# Allegro board PROIECT1 PCB.brd
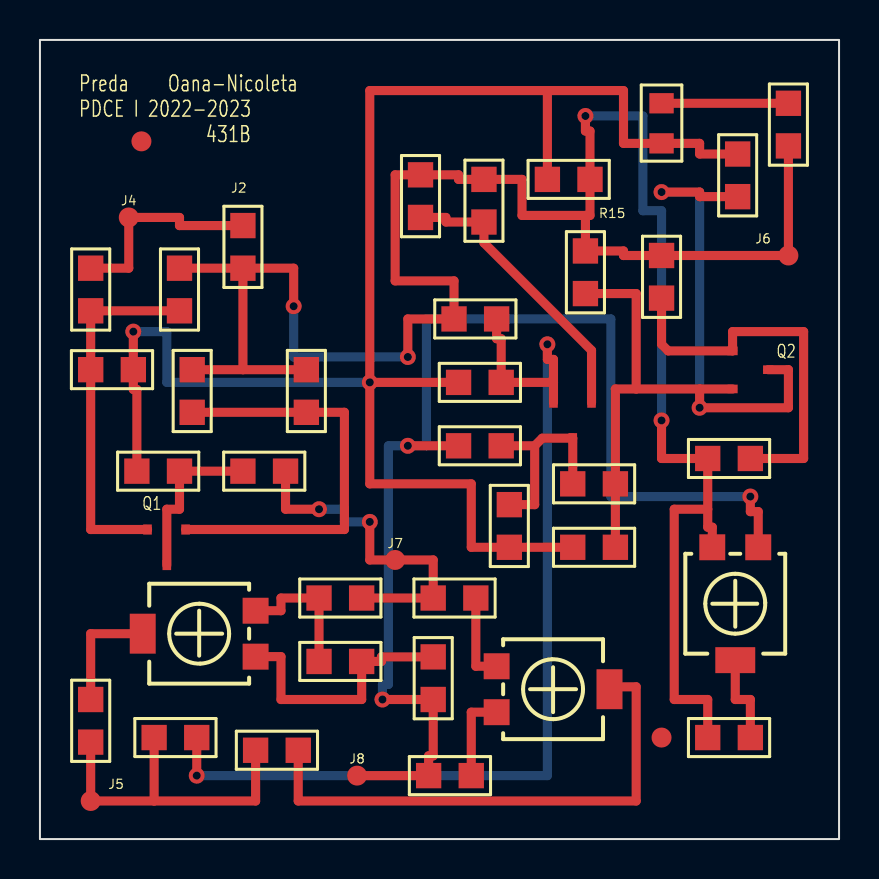
[diagram p0: board, top side]
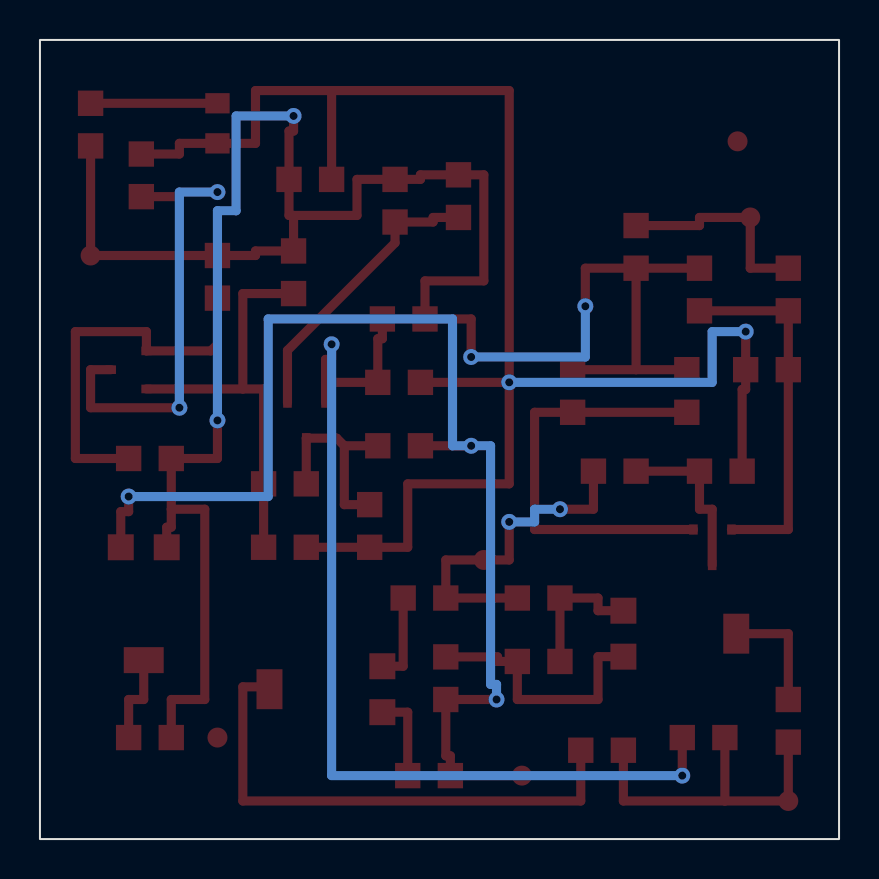
[diagram p1: board, bottom side, seen from below]

Outline 40 x 40 mm; copper layers: TOP, BOTTOM. Coordinates in mm from the lower left corner of the outline.
Outline path: rectangle 0,0 40,40

## Design rules (mm)
nets with their own width: min track width 0.457; nets GND N100149 N100153 N100161 N100173 N100183 N100207 N100221 N100229 N100265 N100275 N100287 N100353 N100359 N100485 N100523 N100783 N101301 N101533 N101539 N101607 N1070531

## Placement (name value [footprint] x y rotation side)
C1  10u  [SMC0805]  2.54 28.57 270 top
C2  2.2n  [SMC0805]  13.97 8.89 0 top
C3  470p  [SMC0805]  19.68 12.06 0 top
C4  470p  [SMC0805]  21.59 3.17 180 top
C5  10u  [SMC0805]  20.95 19.68 0 top
C6  10u  [SMC0805]  31.11 29.21 270 top
C7  10u  [SMC0805]  22.23 33.02 270 top
C8  10u  [SMC0805]  26.67 17.78 0 top
C9  10u  [SMC0805]  13.34 23.5 270 top
C10  10u  [SMC0805]  10.16 18.41 0 top
C11  10u  [SMC0805]  5.71 5.08 0 top
D1  LED  [SML0805]  31.11 36.83 270 top
J1  VIN  [SMR0805]  25.4 33.02 0 top
J2  VIN  [SMR0805]  10.16 28.57 90 top
J3  VOUT  [SMR0805]  35.56 5.08 180 top
J4  CON1  [TP100]  4.45 31.11 0 top
J5  CON1  [TP100]  2.54 1.91 0 top
J6  CON1  [TP100]  37.47 29.21 0 top
J7  CON1  [TP100]  17.78 13.97 0 top
J8  CON1  [TP100]  15.88 3.17 0 top
NOREF  -  [unnamed]  31.11 5.08 0 top
NOREF#2  -  [unnamed]  5.08 34.92 0 top
P1  100k  [TS53YL]  10.79 11.43 0 top
P2  100k  [TS53YL]  22.86 6.35 180 top
P3  100k  [TS53YL]  33.66 14.61 90 top
Q1  QBC817-25  [SOT23]  6.35 14.61 270 top
Q2  QBC817-25  [SOT23]  35.56 23.5 0 top
Q3  QBC817-25  [SOT23]  26.67 20.95 270 top
R1  10k  [SMR0805]  2.54 23.5 0 top
R2  6.8k  [SMR0805]  6.99 28.57 270 top
R3  3k  [SMR0805]  6.99 18.41 180 top
R4  3.8k  [SMR0805]  7.62 23.5 270 top
R5  1k  [SMR0805]  13.97 12.06 0 top
R6  100k  [SMR0805]  19.68 6.99 90 top
R7  4.7k  [SMR0805]  2.54 6.99 270 top
R8  15k  [SMR0805]  20.95 22.86 0 top
R9  1.5k  [SMR0805]  22.86 26.04 180 top
R10  5k  [SMR0805]  34.92 34.29 270 top
R11  10k  [SMR0805]  35.56 19.05 180 top
R12  510  [SMR0805]  10.79 4.45 0 top
R13  100  [SMR0805]  19.05 31.11 90 top
R14  0.8k  [SMR0805]  23.5 14.61 90 top
R15  30k  [SMR0805]  27.3 27.3 90 top
R16  30k  [SMR0805]  26.67 14.61 0 top
R18  1k  [SMR0805]  37.47 36.83 270 top

## Library data of the parts
C1-C11 = C
D1 = LED
J1-J3 = CON2
J4-J8 = CON1
P1-P3 = POT
Q1-Q3 = QBC817-25
R1-R16 R18 = R

## Footprints (pads in the part's own frame, mm; a bottom-side part is the same pattern mirrored in y, then rotated)
SMC0805
  rect 1.27x1.27 smd: 1(0,0) 2(2.134,0)
SML0805
  rect 1.016x1.219 smd: 1(0,0) 2(2.007,0)
SMR0805
  rect 1.27x1.27 smd: 1(0,0) 2(2.134,0)
SOT23
  rect 0.508x0.432 smd: 1(-0.889,0.94) 2(-0.889,-0.965) 3(0.889,0)
TP100
  round 1 smd: 1(0,0)
TS53YL
  rect 1.3x1.3 smd: 1(0,0) 3(0,-2.3)
  rect 1.3x2 smd: 2(-5.65,-1.15)
unnamed
  round 1 smd: (0,0)

## Nets
GND: C6.1 C7.1 C9.1 J1.2 J2.1 J3.2 J6.1 P3.1 R2.1 R4.1 R9.2 R11.2 R13.2 R15.2 R18.2
N100149: C11.2 Q3.2(B) R8.2 R9.1
N100153: P2.2(T) R12.2
N100161: D1.2(ANODE) J1.1 R1.2 R3.2 R8.1 R10.1 R14.1 R16.1
N100173: C3.1 C10.2 J7.1 R5.2
N100183: C4.2 C5.1 J8.1 P3.3(2) R6.1
N100207: C11.1 J5.1 R7.2 R12.1
N100221: C6.2 Q2.1(E) R11.1
N100229: C8.2 Q2.2(B) Q2.3(C) R10.2 R15.1 R16.2
N100265: C1.1 J2.2 J4.1
N100275: C1.2 Q1.2(B) R1.1 R2.2
N100287: C9.2 Q1.1(E) R4.2
N100353: C10.1 Q1.3(C) R3.1
N100359: C7.2 Q3.1(E) R13.1
N100485: C2.1 P1.1 R5.1
N100523: C5.2 C8.1 Q3.3(C) R14.2
N100783: C2.2 P1.3(2) R6.2
N101301: P1.2(T) R7.1
N101533: C3.2 P2.3(2)
N101539: C4.1 P2.1
N101607: J3.1 P3.2(T)
N1070531: D1.1(CATHODE) R18.1

## Via types
v1: diameter 0.8, hole 0.4, TOP to BOTTOM, 15 vias

## Routing (per net, layer and track width the routed paths; a pad name or vN(x,y) marks a point on that pad's centre or on a via; arc(x,y) is an arc through that point)
GND: length 118.4
  TOP w0.457: 27.3,31.22 R15.2 29.21,29.44 29.21,29.21 C6.1 J6.1 R18.2 ; 27.3,31.22 27.53,31.22 J1.2 27.53,35.44 27.3,35.44 v1(27.3,36.2) ; 27.3,31.22 24.13,31.22 24.13,33.02 C7.1 20.95,33.02 20.95,33.25 R13.2 17.78,33.25 17.78,27.94 20.73,27.94 R9.2 18.41,26.04 v1(18.41,24.13) ; J2.1 10.16,23.5 ; J2.1 R2.1 ; J2.1 12.7,28.57 v1(12.7,26.67) ; 10.16,23.5 R4.1 ; 10.16,23.5 C9.1 ; 33.43,16.51 R11.2 31.11,19.05 v1(31.11,20.95) ; 33.43,16.51 31.75,16.51 31.75,6.99 33.43,6.99 J3.2 ; 33.43,16.51 33.43,15.61 33.66,15.61 P3.1
  BOTTOM w0.457: v1(27.3,36.2) 30.18,36.2 30.18,31.45 31.11,31.45 v1(31.11,20.95) ; v1(12.7,26.67) 12.7,24.13 v1(18.41,24.13)
N100149: length 50.3
  TOP w0.457: C11.2 v1(7.85,3.17) ; 25.7,22.86 25.7,24.01 25.4,24.01 v1(25.4,24.77) ; 25.7,22.86 Q3.2 ; 25.7,22.86 R8.2 23.09,25.04 22.86,25.04 R9.1
  BOTTOM w0.457: v1(25.4,24.77) 25.4,3.17 v1(7.85,3.17)
N100153: length 26.6
  TOP w0.457: P2.2 28.51,7.62 29.84,7.62 29.84,1.91 12.93,1.91 R12.2
N100161: length 85
  TOP w0.457: J1.1 25.4,37.47 ; 25.4,37.47 16.51,37.47 v1(16.51,22.86) ; 25.4,37.47 29.21,37.47 29.21,34.82 D1.2 33.02,34.82 33.02,34.29 R10.1 ; R16.1 R14.1 21.59,14.61 21.59,17.78 16.51,17.78 v1(16.51,22.86) ; v1(16.51,22.86) R8.1 ; v1(4.67,25.4) R1.2 4.67,22.5 4.85,22.5 R3.2
  BOTTOM w0.457: v1(4.67,25.4) 6.35,25.4 6.35,22.86 v1(16.51,22.86)
N100173: length 17.3
  TOP w0.457: v1(13.97,16.51) 12.29,16.51 C10.2 ; R5.2 C3.1 19.68,13.97 J7.1 16.51,13.97 v1(16.51,15.88)
  BOTTOM w0.457: v1(16.51,15.88) 15.24,15.88 15.24,16.51 v1(13.97,16.51)
N100183: length 62
  TOP w0.457: v1(18.41,19.68) C5.1 ; P3.3 35.95,16.39 35.56,16.39 v1(35.56,17.14) ; J8.1 C4.2 19.46,4.17 19.68,4.17 R6.1 v1(17.14,6.99)
  BOTTOM w0.457: v1(17.14,6.99) 17.14,7.74 17.44,7.74 17.44,19.68 v1(18.41,19.68) 19.35,19.68 19.35,26.04 28.57,26.04 28.57,17.14 v1(35.56,17.14)
N100207: length 16.9
  TOP w0.457: 5.71,1.91 J5.1 R7.2 ; 5.71,1.91 10.79,1.91 R12.1 ; 5.71,1.91 C11.1
N100221: length 19.5
  TOP w0.457: C6.2 31.11,24.77 31.45,24.43 Q2.1 34.67,25.4 38.23,25.4 38.23,19.05 R11.1
N100229: length 46.2
  TOP w0.457: v1(31.11,32.38) 33.02,32.38 33.02,32.16 R10.2 ; 36.45,23.5 37.47,23.5 37.47,21.59 v1(33.02,21.59) 33.02,22.53 ; 33.02,22.53 29.84,22.53 ; 33.02,22.53 Q2.2 ; 29.84,22.53 29.84,27.3 R15.1 ; 29.84,22.53 28.8,22.53 C8.2 R16.2
  BOTTOM w0.457: v1(33.02,21.59) 33.02,32.38 v1(31.11,32.38)
N100265: length 10.6
  TOP w0.457: J2.2 6.99,30.71 6.99,31.11 J4.1 4.45,28.57 C1.1
N100275: length 18.2
  TOP w0.457: Q1.2 2.54,15.49 R1.1 C1.2 R2.2
N100287: length 21.4
  TOP w0.457: Q1.1 15.24,15.49 15.24,21.36 C9.2 R4.2
N100353: length 8.5
  TOP w0.457: Q1.3 6.35,16.51 6.99,16.51 R3.1 C10.1
N100359: length 14.7
  TOP w0.457: R13.1 20.32,31.11 20.32,30.89 C7.2 22.23,29.84 27.61,24.46 Q3.1
N100485: length 7
  TOP w0.457: C2.1 R5.1 12.06,12.06 12.06,11.43 P1.1
N100523: length 10.2
  TOP w0.457: 24.77,19.68 25.15,20.07 Q3.3 C8.1 ; 24.77,19.68 24.77,16.74 R14.2 ; 24.77,19.68 C5.2
N100783: length 13.2
  TOP w0.457: P1.3 12.06,9.13 12.06,6.99 16.1,6.99 C2.2 17.09,8.89 17.09,9.12 R6.2
N101301: length 5.9
  TOP w0.457: R7.1 2.54,10.28 P1.2
N101533: length 4.5
  TOP w0.457: C3.2 21.82,8.65 P2.3
N101539: length 4.4
  TOP w0.457: P2.1 21.59,6.35 C4.1
N101607: length 4.6
  TOP w0.457: P3.2 34.81,6.99 35.56,6.99 J3.1
N1070531: length 6.4
  TOP w0.457: D1.1 R18.1

## Text on the board
Ref Des/Silkscreen Top: Preda | PDCE I 2022-2023 | Oana-Nicoleta | 431B
XSECTION_CHART: *  SURFACE - AIR 0 MIL | L1: TOP CONDUCTOR - COPPER 0.71 MIL | *  DIELECTRIC - FR-4 59.06 MIL | L2: BOTTOM CONDUCTOR - COPPER 0.71 MIL | DESIGN CROSS SECTION CHART | ___________________________ | TOTAL THICKNESS 60.48 MIL | 1-2 | FIGURE | SIZE | 0.40005 | DRILL CHART: TOP to BOTTOM | ALL UNITS ARE IN MILLIMETERS | PLATED | QTY | 15
